# EAGLE board medi_9_cpxsq (EAGLE 6.0)

Size 60.96 x 60.96 mm. Coordinates in mm from the lower left corner, seen from the top.
Outline: 0,0 0,60.96 60.96,60.96 60.96,0 0,0
Copper layers (1*16): Top 0.035mm / dielectric 1.5mm / Bottom 0.035mm
Design rules: minimum track width 10mil, minimum drill 24mil, track to track 8mil, track to pad 8mil, pad to pad 8mil, via to via 8mil, smd to smd 8mil, copper to edge 40mil, drill to drill 8mil, minimum pad ring 10mil, minimum via ring 8mil, stop-mask expansion 4mil, vias tented up to drill 0mil, thermal gap 10mil
Holes 3.2 mm at 7.62,7.62 7.62,53.34 53.34,7.62 53.34,53.34

## Footprints (pad centres in the part's own frame; a part is rotated, then mirrored left to right if it is on the bottom)
LED5MM = drill 0.813 octagon: A -1.27,0; K 1.27,0
1X01 = drill 1.016 octagon: 1 0,0

## Placement (x,y rotation side)
00  [LED5MM]  3.81,3.81 0 top
01  [LED5MM]  11.43,3.81 0 top
02  [LED5MM]  19.05,3.81 0 top
03  [LED5MM]  26.67,3.81 0 top
04  [LED5MM]  34.29,3.81 0 top
05  [LED5MM]  41.91,3.81 0 top
06  [LED5MM]  49.53,3.81 0 top
07  [LED5MM]  57.15,3.81 0 top
10  [LED5MM]  3.81,11.43 0 top
11  [LED5MM]  11.43,11.43 0 top
12  [LED5MM]  19.05,11.43 0 top
13  [LED5MM]  26.67,11.43 0 top
14  [LED5MM]  34.29,11.43 0 top
15  [LED5MM]  41.91,11.43 0 top
16  [LED5MM]  49.53,11.43 0 top
17  [LED5MM]  57.15,11.43 0 top
20  [LED5MM]  3.81,19.05 0 top
21  [LED5MM]  11.43,19.05 0 top
22  [LED5MM]  19.05,19.05 0 top
23  [LED5MM]  26.67,19.05 0 top
24  [LED5MM]  34.29,19.05 0 top
25  [LED5MM]  41.91,19.05 0 top
26  [LED5MM]  49.53,19.05 0 top
27  [LED5MM]  57.15,19.05 0 top
30  [LED5MM]  3.81,26.67 0 top
31  [LED5MM]  11.43,26.67 0 top
32  [LED5MM]  19.05,26.67 0 top
33  [LED5MM]  26.67,26.67 0 top
34  [LED5MM]  34.29,26.67 0 top
35  [LED5MM]  41.91,26.67 0 top
36  [LED5MM]  49.53,26.67 0 top
37  [LED5MM]  57.15,26.67 0 top
40  [LED5MM]  3.81,34.29 0 top
41  [LED5MM]  11.43,34.29 0 top
42  [LED5MM]  19.05,34.29 0 top
43  [LED5MM]  26.67,34.29 0 top
44  [LED5MM]  34.29,34.29 0 top
45  [LED5MM]  41.91,34.29 0 top
46  [LED5MM]  49.53,34.29 0 top
47  [LED5MM]  57.15,34.29 0 top
50  [LED5MM]  3.81,41.91 0 top
51  [LED5MM]  11.43,41.91 0 top
52  [LED5MM]  19.05,41.91 0 top
53  [LED5MM]  26.67,41.91 0 top
54  [LED5MM]  34.29,41.91 0 top
55  [LED5MM]  41.91,41.91 0 top
56  [LED5MM]  49.53,41.91 0 top
57  [LED5MM]  57.15,41.91 0 top
60  [LED5MM]  3.81,49.53 0 top
61  [LED5MM]  11.43,49.53 0 top
62  [LED5MM]  19.05,49.53 0 top
63  [LED5MM]  26.67,49.53 0 top
64  [LED5MM]  34.29,49.53 0 top
65  [LED5MM]  41.91,49.53 0 top
66  [LED5MM]  49.53,49.53 0 top
67  [LED5MM]  57.15,49.53 0 top
70  [LED5MM]  3.81,57.15 0 top
71  [LED5MM]  11.43,57.15 0 top
72  [LED5MM]  19.05,57.15 0 top
73  [LED5MM]  26.67,57.15 0 top
74  [LED5MM]  34.29,57.15 0 top
75  [LED5MM]  41.91,57.15 0 top
76  [LED5MM]  49.53,57.15 0 top
77  [LED5MM]  57.15,57.15 0 top
H0  [1X01]  20.32,7.62 0 top
H1  [1X01]  22.86,7.62 0 top
H2  [1X01]  25.4,7.62 0 top
H3  [1X01]  27.94,7.62 0 top
H4  [1X01]  30.48,7.62 0 top
H5  [1X01]  33.02,7.62 0 top
H6  [1X01]  35.56,7.62 0 top
H7  [1X01]  38.1,7.62 0 top
H8  [1X01]  40.64,7.62 0 top

## Library data of the parts
00 01-07 10-17 20-27 30-37 40-47 50-57 60-67 70-77 = led
H0 H1-H8 = pinhead

## Nets
D: 00.A 11.A 22.A 33.A 44.A 55.A 66.A 77.A H8.1
S0: 00.K 01.A 02.A 03.A 04.A 05.A 06.A 07.A 10.K 20.K 30.K 40.K 50.K 60.K 70.K H0.1
S1: 01.K 10.A 11.K 12.A 13.A 14.A 15.A 16.A 17.A 21.K 31.K 41.K 51.K 61.K 71.K H1.1
S2: 02.K 12.K 20.A 21.A 22.K 23.A 24.A 25.A 26.A 27.A 32.K 42.K 52.K 62.K 72.K H2.1
S3: 03.K 13.K 23.K 30.A 31.A 32.A 33.K 34.A 35.A 36.A 37.A 43.K 53.K 63.K 73.K H3.1
S4: 04.K 14.K 24.K 34.K 40.A 41.A 42.A 43.A 44.K 45.A 46.A 47.A 54.K 64.K 74.K H4.1
S5: 05.K 15.K 25.K 35.K 45.K 50.A 51.A 52.A 53.A 54.A 55.K 56.A 57.A 65.K 75.K H5.1
S6: 06.K 16.K 26.K 36.K 46.K 56.K 60.A 61.A 62.A 63.A 64.A 65.A 66.K 67.A 76.K H6.1
S7: 07.K 17.K 27.K 37.K 47.K 57.K 67.K 70.A 71.A 72.A 73.A 74.A 75.A 76.A 77.K H7.1

## Tracks (layer width: path | path; a pad name or v marks a point on that pad's centre or on a via)
D  (8 unrouted)
S0  (15 unrouted)
S1  (15 unrouted)
S2  (15 unrouted)
S3  (15 unrouted)
S4  (15 unrouted)
S5  (15 unrouted)
S6  (15 unrouted)
S7  (15 unrouted)